# Altium PCB LED ChaserPCB.PcbDoc
Units mm, origin at the board's own origin, x right, y up, seen from the top; angles counter-clockwise.
Board outline 69.34 x 54.1 mm, 2 copper layers (Top Layer, Bottom Layer), stack 1.1 mm thick; 19 components, 17 nets, 59 pads, 15 vias.
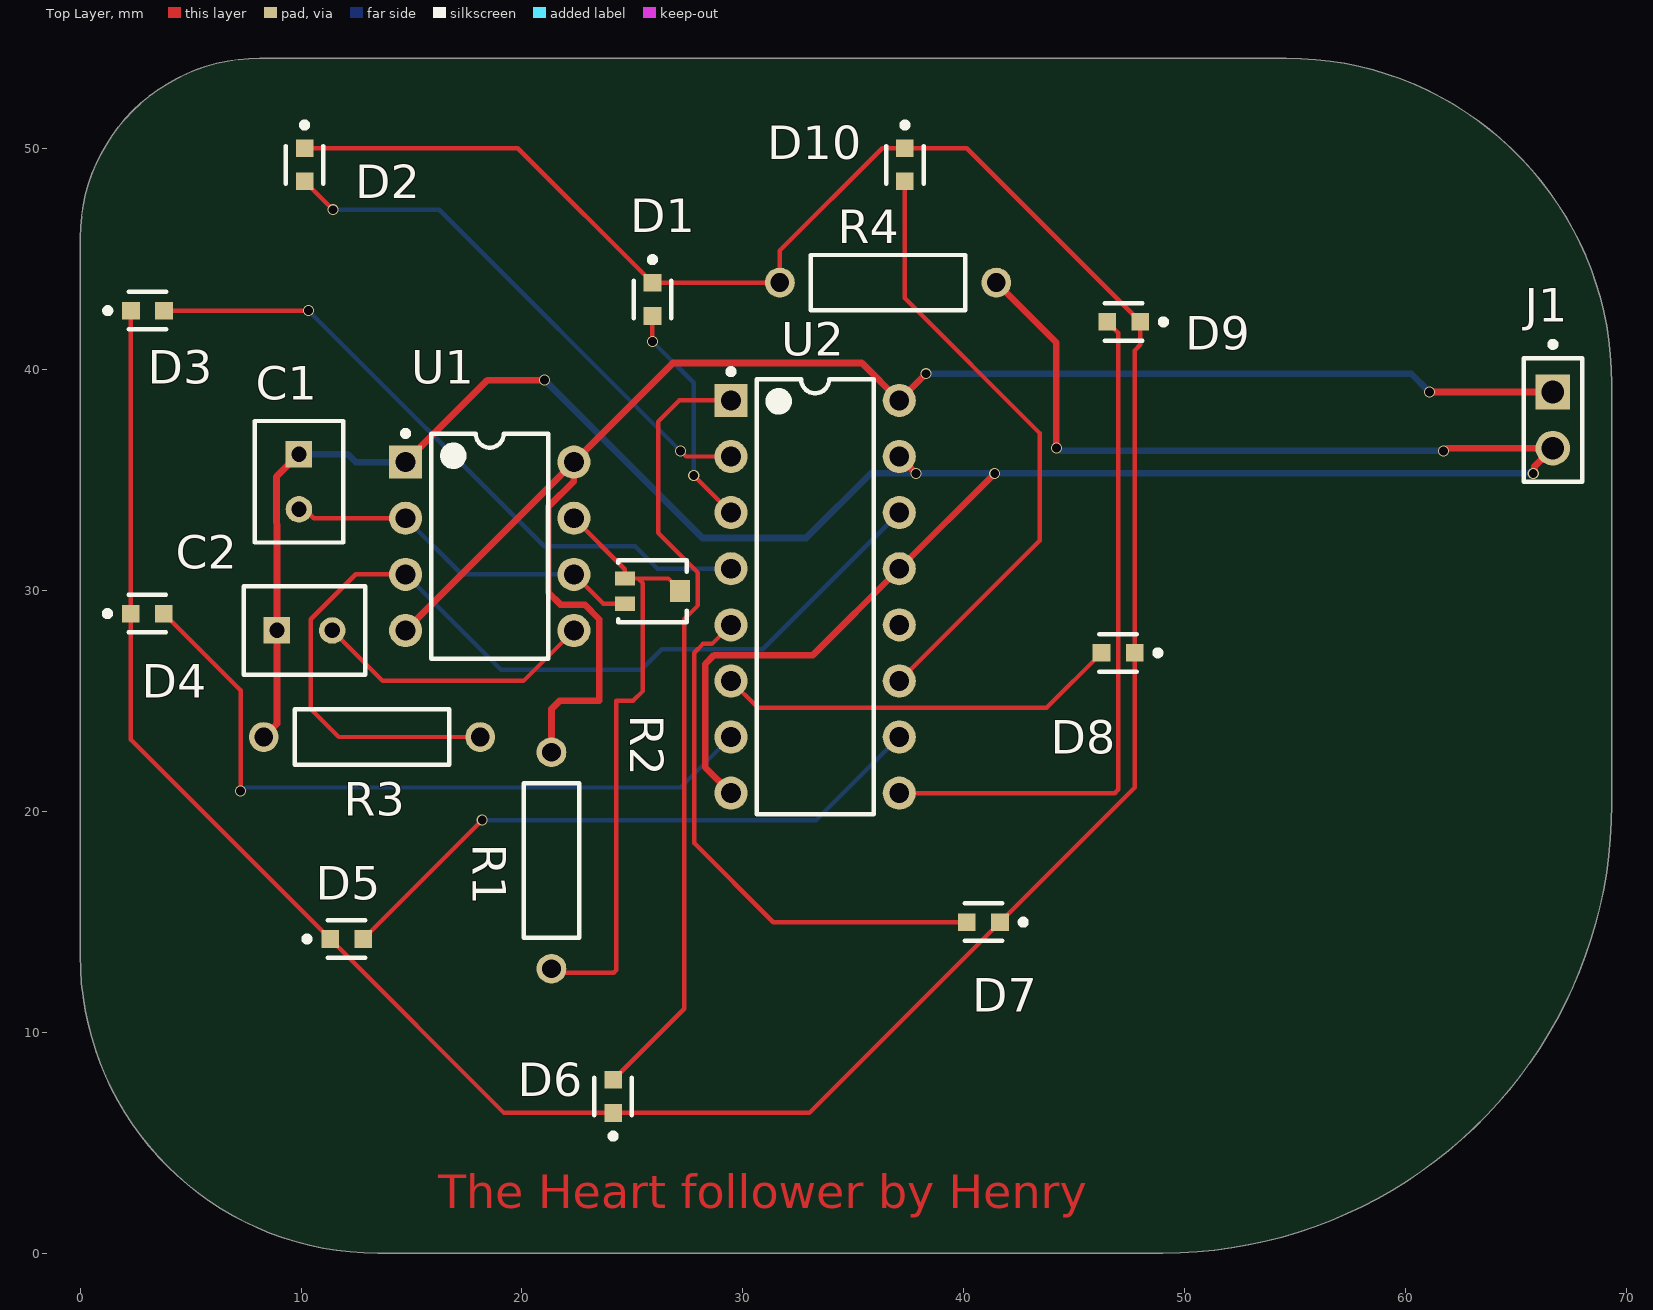
[diagram p0: Top Layer view]
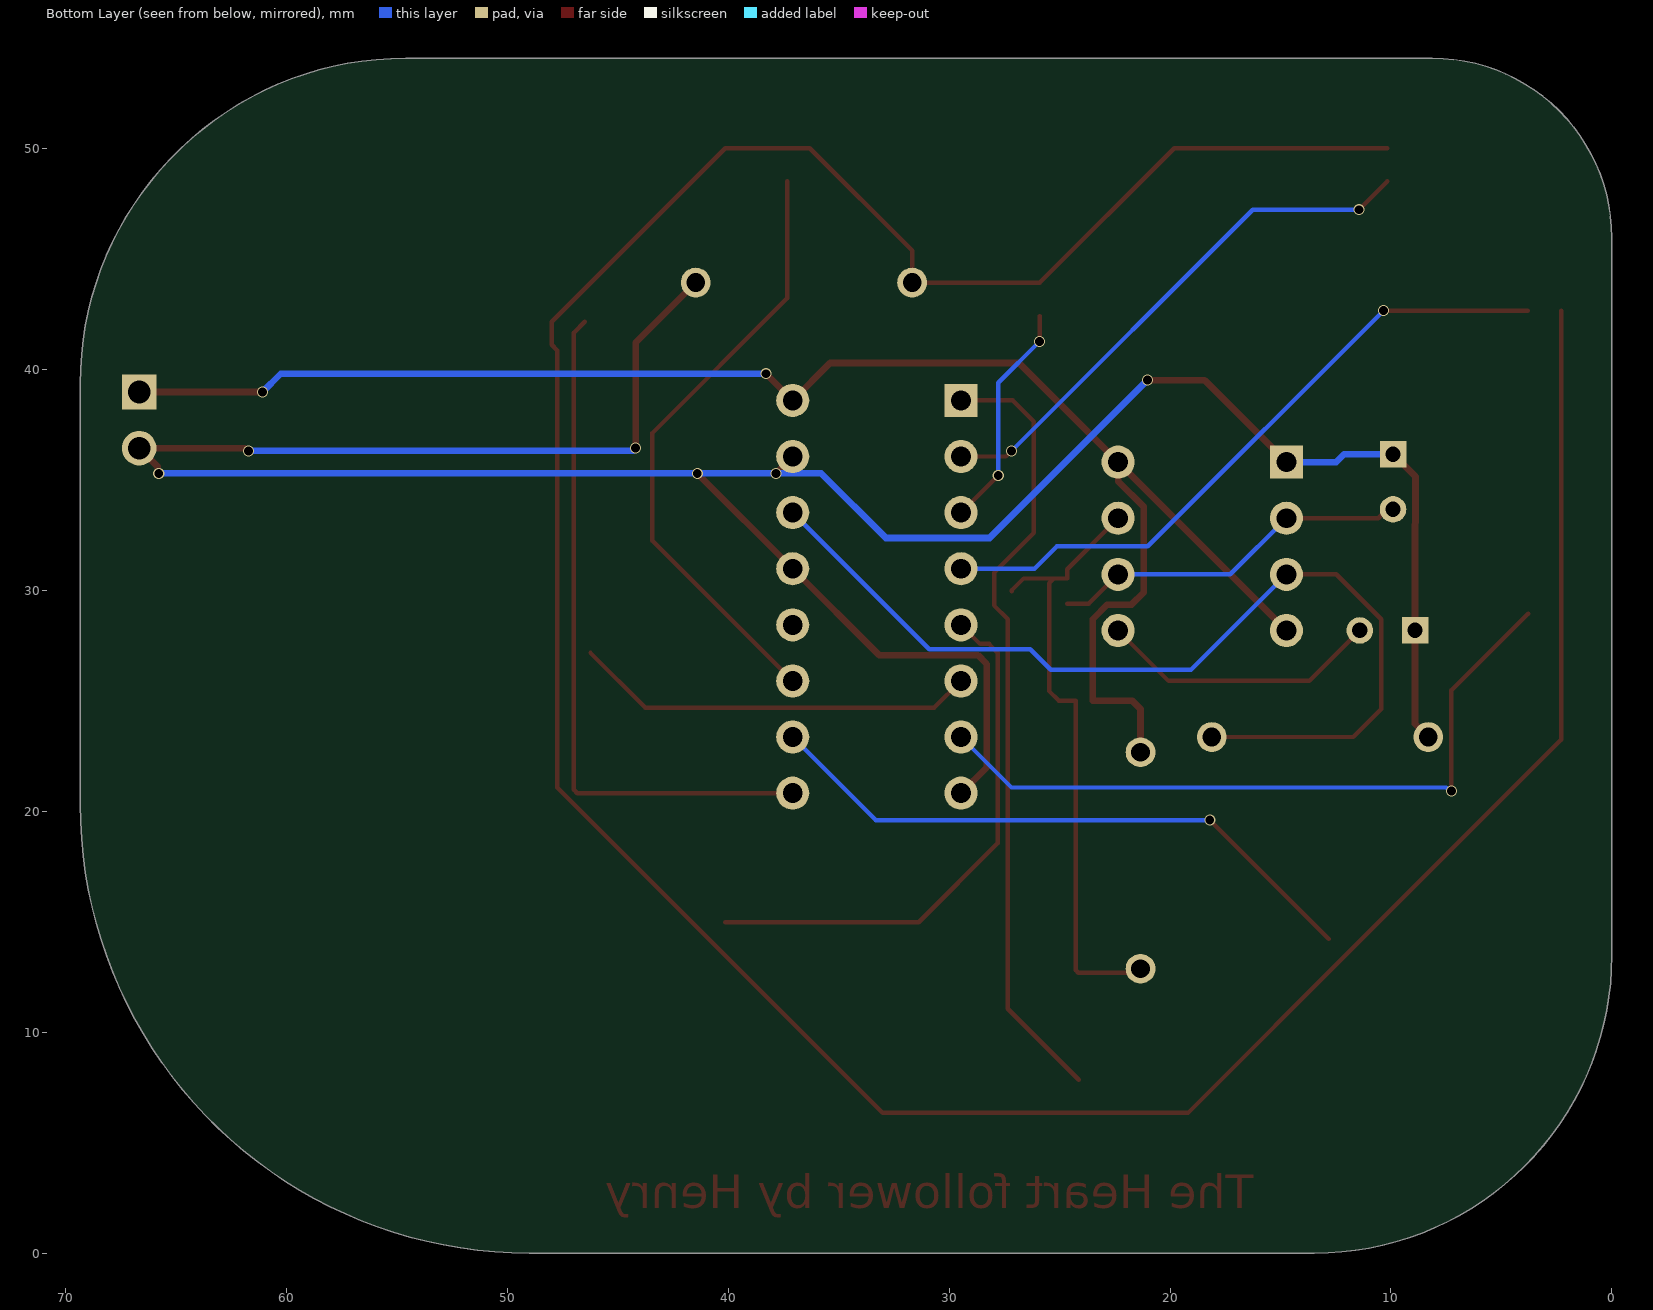
[diagram p1: Bottom Layer view, seen from below]
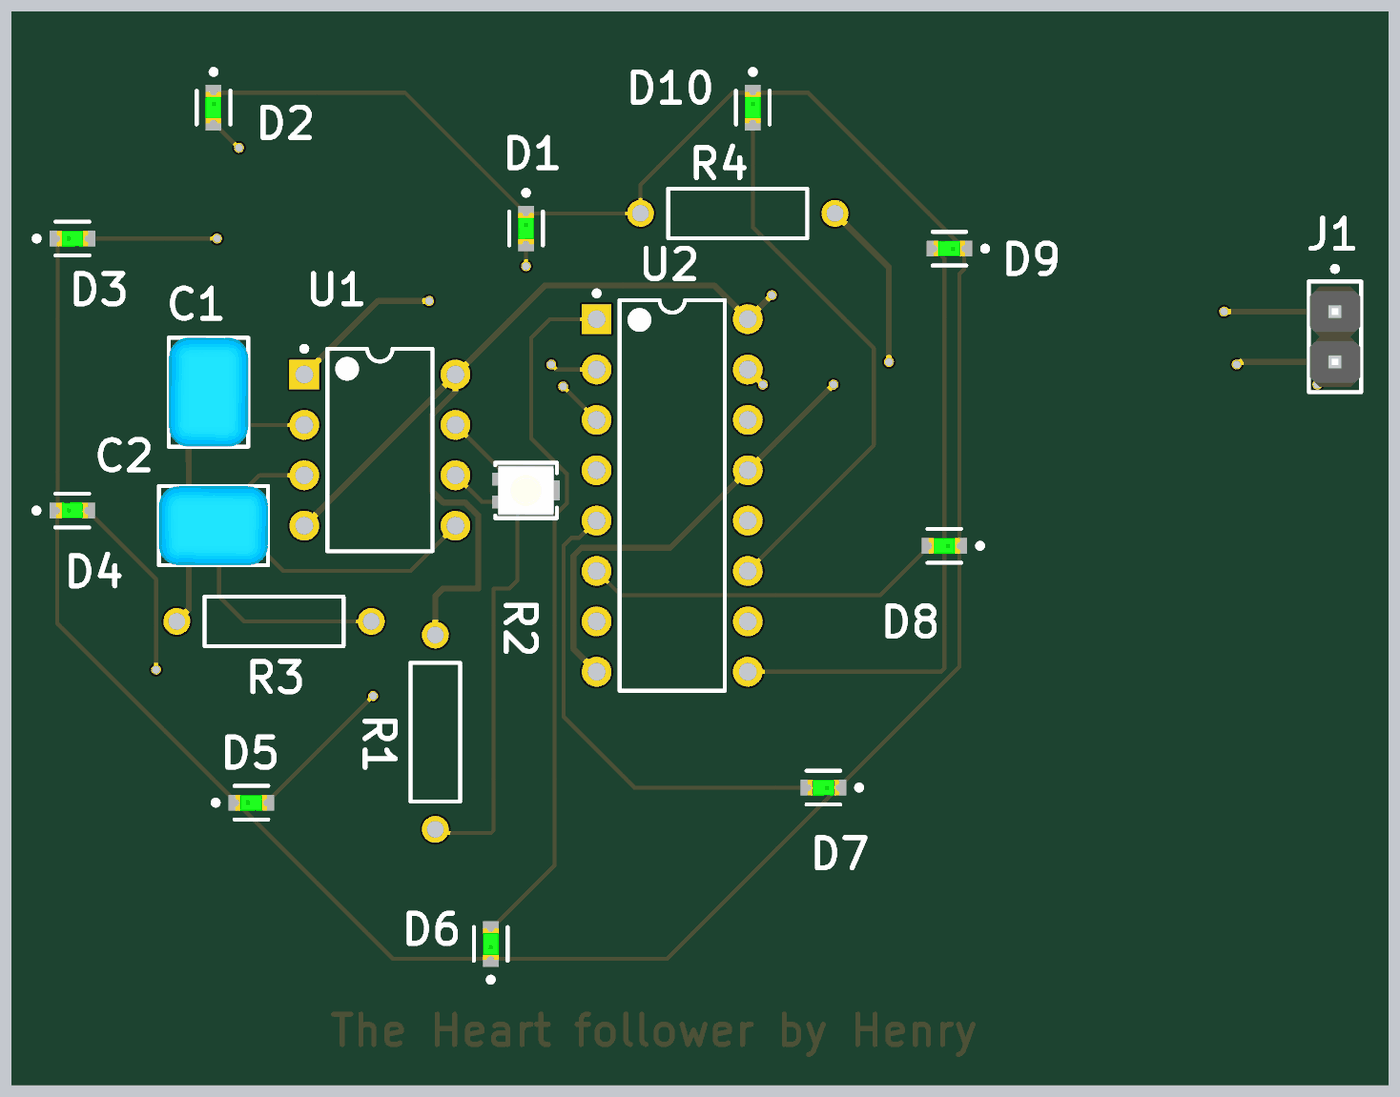
[diagram p2: 3D render of the assembled board from above, using the file's embedded part models]

## Layer stack, top to bottom
Top Solder: solder mask 0.05, Solder Resist, Dk 4
Top Layer: signal copper 0.1
Dielectric 1: dielectric 0.9, FR-4, Dk 4.8
Bottom Layer: signal copper 0.1
Bottom Solder: solder mask 0.05, Solder Resist, Dk 4

## Board outline
13.462,0 49.022,0 ccw(c49.022,20.32) 69.342,20.32 69.342,39.37 ccw(c54.61,39.37) 54.61,54.102 8.128,54.102 ccw(c8.128,45.974) 0,45.974 0,13.462 ccw(c13.462,13.462)

## Design rules (kind name [scope] priority, off if disabled: settings)
Clearance [All] p1: gap=0.25 ignorepadtopadclearanceinfootprint=FALSE
PolygonConnect [All] p1: connectstyle=Relief reliefconductorwidth=0.254 reliefentries=4 polygonreliefangle="90 Angle" airgapwidth=0.254
RoutingVias [All] p1: holewidth=0.4 width=0.5 viastyle="Through Hole" minholewidth=0.4 minwidth=0.5 maxholewidth=0.4 maxwidth=0.5
SolderMaskExpansion [All] p1: expansion=0.102 istentingtop=FALSE
Width WidthPOW [(InNet('VCC') OR InNet('GND'))] p1: maxlimit=0.3 minlimit=0.254 preferedwidth=0.3
Width [All] p2: maxlimit=0.2 minlimit=0.1 preferedwidth=0.2
30 further rules are at their usual default settings.

## Components (designator, comment, footprint, x,y, rotation, side; value= is the part's Value field where it differs from the comment)
C1 "RCER71E106K3DBH03A" FP-RCE3DB-MFG 9.906,34.925 r270 top
C2 "RCER71E106K3DBH03A" FP-RCE3DB-MFG 10.16,28.194 r0 top
D1 "LTST-C190GKT" FP-LTST-C190GKT-MFG 25.908,43.18 r270 top
D2 "LTST-C190GKT" FP-LTST-C190GKT-MFG 10.16,49.276 r270 top
D3 "LTST-C190GKT" FP-LTST-C190GKT-MFG 3.048,42.672 r0 top
D4 "LTST-C190GKT" FP-LTST-C190GKT-MFG 3.036,28.956 r0 top
D5 "LTST-C190GKT" FP-LTST-C190GKT-MFG 12.065,14.224 r0 top
D6 "LTST-C190GKT" FP-LTST-C190GKT-MFG 24.13,7.1 r90 top
D7 "LTST-C190GKT" FP-LTST-C190GKT-MFG 40.894,14.986 r180 top
D8 "LTST-C190GKT" FP-LTST-C190GKT-MFG 46.99,27.178 r180 top
D9 "LTST-C190GKT" FP-LTST-C190GKT-MFG 47.244,42.164 r180 top
D10 "LTST-C190GKT" FP-LTST-C190GKT-MFG 37.338,49.276 r270 top
J1 "M20-9990246" FP-M20-9990246-MFG 66.675,37.719 r270 top
R1 "1M" OMTE-RES7X2.5-2 21.336,17.78 r90 top
R2 "3312J-1-504E" FP-3312-MFG 25.908,29.972 r270 top
R3 "10k" OMTE-RES7X2.5-2 13.208,23.368 r0 top
R4 "120ohm" OMTE-RES7X2.5-2 36.576,43.942 r180 top
U1 "NE555P" P0008A 18.542,32.004 r0 top
U2 "CD74HC4017E" N0016A 33.274,29.718 r0 top

## Footprints (in the part's own frame and the unit in brackets; to place one, negate y for a bottom-side part, rotate by r counter-clockwise, add the part's x,y. Pads: shape width x height; smd on the part's side, far side on the other; paste and mask are expansions set on the pad)
FP-3312-MFG [mm]
  rect 0.65x0.9 smd paste+0 mask+0: 1(-0.575,-1.25) 3(0.575,-1.25)
  rect 1x0.9 smd paste+0 mask+0: 2(0,1.25)
  silkscreen extent -1.4,-1.55 1.4,1.55, body extent -1.5,-1.8 1.5,1.8, height 0.25
FP-LTST-C190GKT-MFG [mm]
  rect 0.8x0.8 smd paste+0 mask+0: 1(-0.75,0) 2(0.75,0)
  silkscreen extent -1.92,-0.85 0.85,0.85, body extent -1.25,-0.55 1.25,0.55, height 0.25
FP-M20-9990246-MFG [mm]
  rect 1.57x1.57 hole 1.02 paste-2539.97 mask+0: 1(-1.27,0)
  round 1.57 hole 1.02 paste-2539.97 mask+0: 2(1.27,0)
  silkscreen extent -3.55,-1.32 2.79,1.32, body extent -2.89,-1.42 2.89,1.42, height 0.25
FP-RCE3DB-MFG [mm]
  rect 1.2x1.2 hole 0.7 paste-2539.97 mask+0: 1(-1.25,0)
  round 1.2 hole 0.7 paste-2539.97 mask+0: 2(1.25,0)
  silkscreen extent -2.75,-2 2.75,2, body extent -2.85,-2.1 2.85,2.1, height 0.25
N0016A [mm] "DIP, 16-Leads, Body 19.7x6.6mm, Pitch 2.54mm"
  rect 1.5x1.5 hole 0.9: 1(-3.81,8.89)
  round 1.5 hole 0.9: 2(-3.81,6.35) 3(-3.81,3.81) 4(-3.81,1.27) 5(-3.81,-1.27) 6(-3.81,-3.81) 7(-3.81,-6.35) 8(-3.81,-8.89) 9(3.81,-8.89) 10(3.81,-6.35) 11(3.81,-3.81) 12(3.81,-1.27) 13(3.81,1.27) 14(3.81,3.81) 15(3.81,6.35) 16(3.81,8.89)
  silkscreen extent -3.93,-9.85 2.65,10.31, body extent -3.95,-9.85 3.95,9.85, height 5.08
OMTE-RES7X2.5-2 [mm] "Resistor, Axial; Body 7x2.5mm, Lead Dia. 0.6mm"
  round 1.35 hole 0.85: 1(-4.9,0) 2(4.9,0)
  silkscreen extent -3.5,-1.25 3.5,1.25, body extent -3.5,-1.25 3.5,1.25, height 2.5
P0008A [mm] "DIP, 8-Leads, Body 10.15x6.6mm, Pitch 2.54mm"
  rect 1.5x1.5 hole 0.9: 1(-3.81,3.81)
  round 1.5 hole 0.9: 2(-3.81,1.27) 3(-3.81,-1.27) 4(-3.81,-3.81) 5(3.81,-3.81) 6(3.81,-1.27) 7(3.81,1.27) 8(3.81,3.81)
  silkscreen extent -3.93,-5.1 2.65,5.23, body extent -3.95,-5.07 3.95,5.07, height 5.08

## Part data
C1: library part CMP-06035-005830-1, "Cap Ceramic 10uF 25V X7R ±10% Radial 2.5mm +125°C Automotive Ammo Pack", Capacitance=22uF, Case/Package=Radial, Dielectric=X7R, Max Operating Temperature=125°C, Min Operating Temperature=-55°C, Package Quantity=1500, Ratings=AEC-Q200, Resistor Type=Ceramic, Tolerance=10%, Voltage Rating=25V, Height=5mm, Height - Seated (Max)=0.197inch, Lead Diameter=0.5mm, Lead Pitch=0.098inch, Lead/Base Style=Straight, Length=0.217inch, Mount="Through Hole", Packaging="Tape and Reel", Termination=Radial, Voltage Rating (DC)=25V, Width=0.157inch
C2: library part CMP-06035-005830-1, "Cap Ceramic 10uF 25V X7R ±10% Radial 2.5mm +125°C Automotive Ammo Pack", Capacitance=10nF, Case/Package=Radial, Dielectric=X7R, Max Operating Temperature=125°C, Min Operating Temperature=-55°C, Package Quantity=1500, Ratings=AEC-Q200, Resistor Type=Ceramic, Tolerance=10%, Voltage Rating=25V, Height=5mm, Height - Seated (Max)=0.197inch, Lead Diameter=0.5mm, Lead Pitch=0.098inch, Lead/Base Style=Straight, Length=0.217inch, Mount="Through Hole", Packaging="Tape and Reel", Termination=Radial, Voltage Rating (DC)=25V, Width=0.157inch
D1 D2 D3 D4 D5 D6 D7 D8 D9 D10: library part CMP-22017-000005-2, "LED GREEN CLEAR CHIP SMD", Case Code (Imperial)=0603, Case Code (Metric)=1608, Color=Green, Forward Current=30mA, Forward Voltage=2.1V, Lens Color=Colorless, Max Operating Temperature=85°C, Min Operating Temperature=-55°C, Package Quantity=1, Power Dissipation=100mW, Reverse Voltage=5V, Test Current=10mA, Voltage=2V, Case/Package=0603, Depth=0.8mm, Dominant Wavelength=569nm, Height=0.8mm, Illumination Color=Green, Lead Free="Lead Free", Length=1.6mm, Lens Style=Clear, Lens Transparency=Clear, Luminous Intensity=6mcd, Mount="Surface Mount", Number of Elements=1, Number of LEDs=1, Number of Pins=2, Packaging="Tape and Reel", Power Rating=100mW, Radiation Hardening=No, Viewing Angle=130°, Wavelength=565nm, Width=0.8mm
J1: library part CMP-15831-000009-1, "CONN HEADER VERT 2POS 2.54MM", Current Rating=3A, Manufacturer=Harwin, Temperature="-40°C to +105°C", Temperature Range High=+105°C, Temperature Range Low=-40°C, Automotive=No, Category=Conn, ComponentLink2Description=Datasheet, ComponentLink2URL=https://cdn.harwin.com/pdfs/M20-999.pdf, Conn Gender=Male, Conn Orientation=Vertical, Contact Material=Tin,Nickel, Device Class L1=Connectors, Device Class L2="Headers and Wire Housings", Device Class L3=unset, Digikey Description="CONN HEADER VERT 2POS 2.54MM", Height=8.99mm, Lead Free=Yes, Manufacturer Part Number=M20-9990246, Mouser Description="2.54mm (0.1\") Pitch SIL Vertical PC Tail Pin Header, 6.1mm mating pin height, tin, 2 contacts", Number Of Contacts=2, Number Of Rows=1, Octopart=https://octopart.com/m20-9990246-harwin-2590635, Package=M20-9990246, Pitch=2.54mm, RoHS=TRUE
R1: library part CMP-2000-06865-1, "Little Demon(R) Carbon Composition Molded OD Series, 250 V, 10 KOhm, +/-5%, -70 to 130 degC, 2-Pin THD, RoHS, Bulk", Manufacturer=Ohmite, Operating Temperature=-, Package / Case=Axial, Package Description="2-Pin THD Resistor, Body 7 x 2.5 mm, Lead Dia. 0.6 mm", Package Reference=RES7X2.5, PartNumber=OD103JE, Power (Watts)=0.25W,1/4W, Power Rating=0.25W, Resistance (Ohms)=10M, Standard Package=100, Tolerance=±5%, Catalog Drawings=OD,OF,OASeries, Category=Resistors, Composition=CarbonComposition, Datasheet URL=http://www.ohmite.com/cat/res_od_of_oa.pdf, Datasheet Version=06/2016, EDA / CAD Models=DownloadfromAcceleratedDesigns, Family=ThroughHoleResistors, Features=PulseWithstanding, Height=-, Manufacturer URL=http://www.ohmite.com/, Mounting Technology=ThroughHole, Number of Terminations=2, Online Catalog=OD,OF,OASeries,LittleDemon®, Packaging=Bulk, RoHS Information="LittleDemon\"E\"SeriesMaterialDeclaration", Series=LittleDemon®OD, Size / Dimension="0.098\"Diax0.276\"L(2.50mmx7.00mm)", Supplier Device Package=Axial, Temperature Coefficient=-
R2: library part CMP-07234-000022-1, "TRIMMER 500K OHM 0.1W J LEAD TOP", Insulation Resistance=500MR, Max Operating Temperature=125°C, Max Power Dissipation=100mW, Min Operating Temperature=-55°C, Package Quantity=1, Resistance=50kR, Temperature Coefficient=100ppm/°C, Tolerance=20%, Voltage Rating=500V, Composition=Cermet, Depth=2.8mm, Height=0.067inch, Length=2.5mm, Mount="Surface Mount", Number of Turns=1, Packaging="Tape and Reel", Power Rating=100mW, REACH SVHC="No SVHC", Termination=J-Hook, Voltage Rating (DC)=500V, Weight=0.0321g, Width=2.5mm
R3: library part CMP-2000-06865-1, "Little Demon(R) Carbon Composition Molded OD Series, 250 V, 10 KOhm, +/-5%, -70 to 130 degC, 2-Pin THD, RoHS, Bulk", Manufacturer=Ohmite, Operating Temperature=-, Package / Case=Axial, Package Description="2-Pin THD Resistor, Body 7 x 2.5 mm, Lead Dia. 0.6 mm", Package Reference=RES7X2.5, PartNumber=OD103JE, Power (Watts)=0.25W,1/4W, Power Rating=0.25W, Standard Package=100, Tolerance=±5%, Catalog Drawings=OD,OF,OASeries, Category=Resistors, Composition=CarbonComposition, Datasheet URL=http://www.ohmite.com/cat/res_od_of_oa.pdf, Datasheet Version=06/2016, EDA / CAD Models=DownloadfromAcceleratedDesigns, Family=ThroughHoleResistors, Features=PulseWithstanding, Height=-, Manufacturer URL=http://www.ohmite.com/, Mounting Technology=ThroughHole, Number of Terminations=2, Online Catalog=OD,OF,OASeries,LittleDemon®, Packaging=Bulk, Resistance (Ohms)=10k, RoHS Information="LittleDemon\"E\"SeriesMaterialDeclaration", Series=LittleDemon®OD, Size / Dimension="0.098\"Diax0.276\"L(2.50mmx7.00mm)", Supplier Device Package=Axial, Temperature Coefficient=-
R4: library part CMP-2000-06865-1, "Little Demon(R) Carbon Composition Molded OD Series, 250 V, 10 KOhm, +/-5%, -70 to 130 degC, 2-Pin THD, RoHS, Bulk", Manufacturer=Ohmite, Operating Temperature=-, Package / Case=Axial, Package Description="2-Pin THD Resistor, Body 7 x 2.5 mm, Lead Dia. 0.6 mm", Package Reference=RES7X2.5, PartNumber=OD103JE, Power (Watts)=0.25W,1/4W, Power Rating=0.25W, Resistance (Ohms)=10k, Standard Package=100, Tolerance=±5%, Catalog Drawings=OD,OF,OASeries, Category=Resistors, Composition=CarbonComposition, Datasheet URL=http://www.ohmite.com/cat/res_od_of_oa.pdf, Datasheet Version=06/2016, EDA / CAD Models=DownloadfromAcceleratedDesigns, Family=ThroughHoleResistors, Features=PulseWithstanding, Height=-, Manufacturer URL=http://www.ohmite.com/, Mounting Technology=ThroughHole, Number of Terminations=2, Online Catalog=OD,OF,OASeries,LittleDemon®, Packaging=Bulk, RoHS Information="LittleDemon\"E\"SeriesMaterialDeclaration", Series=LittleDemon®OD, Size / Dimension="0.098\"Diax0.276\"L(2.50mmx7.00mm)", Supplier Device Package=Axial, Temperature Coefficient=-
U1: library part CMP-2000-04954-1, "Precision Timer, 4.5 to 16 V, 0 to 70 degC, 8-Pin DIP, Pb-Free, Tube", Manufacturer=TexasInstruments, Maximum High Level Output Current=-200mA, Maximum Low Level Output Current=200mA, Operating Supply Voltage=5, Package=8PDIP, Package Description="8-Pin Double In-line Package, Body 9.59 x 6.35 mm, Pitch 2.54 mm", Package Reference=P8, Category=Timer, Datasheet URL=http://www.ti.com/general/docs/lit/getliterature.tsp?genericPartNumber=NE555&fileType=pdf, Datasheet Version="Rev. I, 09/2014", Manufacturer URL=http://www.ti.com/, Number of Internal Timers=1, Package URL=http://www.ti.com/lit/ml/mpdi001b/mpdi001b.pdf, Packaging=Rail/Tube, Rad Hard=No, Type=Standard
U2: library part CMP-1623-00548-2, "High Speed CMOS Logic Decade Counter/Divider with 10 Decoded Outputs, N0016A, TUBE", F @ Nom Voltage(Max)(Mhz)=28, Generic Part Number=CD74HC4017, ICC @ Nom Voltage(Max)(mA)=0.08, Manufacturer="Texas Instruments", Operating Temperature Range(C)="-55 to 125", Rating=Catalog, tpd @ Nom Voltage(Max)(ns)=54, Voltage(Nom)(V)=3.3,5, Bits(#)=10, Code_JEDEC=MS-001, DatasheetVersion=SCHS200D, Function=Counter, Input Type=LVTTL/CMOS, Inputs=1, Output Drive (IOL/IOH)(Max)(mA)=5.2/-5.2, Output Type=CMOS, PackageReference=N0016A, Schmitt Trigger=No, Technology Family=HC, Type=Decade, VCC(Max)(V)=6, VCC(Min)(V)=2

## Via types
v1: diameter 0.5, hole 0.4, Top Layer to Bottom Layer, 15 vias

## Nets (pads, with @x,y where several pads share a name; then routed paths per layer and width w, separated by ;. In a path a pad name is that pad's centre, name@x,y a point inside that pad or via, vN(x,y) a via of type N, cw(c..) or ccw(c..) an arc to the next point about the centre after c; other vN are vias at no path point)
GND: C1.1 C2.1 J1.2 R3.1 R4.1 U1.1 U2.8 U2.13 U2.15 | length 132
  Top Layer w0.3: R3.1 8.91,23.97 C2.1 8.91,30.912 8.89,35.159 C1.1 ; U1.1 18.445,39.527 v1(21.022,39.527) ; U2.8 28.296,21.996 28.296,26.67 28.702,27.076 33.172,27.076 U2.13 v1(41.402,35.306) ; U2.15 v1(37.846,35.306) ; R4.1 44.196,41.222 v1(44.196,36.449) ; v1(61.722,36.322) 61.776,36.322 61.903,36.449 J1.2 65.824,35.598 65.824,35.344 v1(65.786,35.306)
  Bottom Layer w0.3: C1.1 12.116,36.175 12.477,35.814 U1.1 ; v1(21.022,39.527) 28.171,32.378 32.866,32.378 35.794,35.306 v1(37.846,35.306) v1(65.786,35.306) ; v1(44.196,36.449) 44.323,36.322 v1(61.722,36.322)
NetC1_2: C1.2 R2.3 U1.2 U1.6 | length 16.5
  Top Layer w0.2: C1.2 10.177,33.675 10.578,33.274 U1.2 ; U1.6 23.689,29.397 R2.3
  Bottom Layer w0.2: U1.2 17.272,30.734 U1.6
NetC2_2: C2.2 U1.5 | length 12.8
  Top Layer w0.2: C2.2 13.696,25.908 20.066,25.908 U1.5
NetD1_1: D1.1 D2.1 D3.1 D4.1 D5.1 D6.1 D7.1 D8.1 D9.1 D10.1 R4.2 | length 146.2
  Top Layer w0.2: D3.1 2.298,28.968 D4.1 2.286,23.253 D5.1 19.189,6.35 D6.1 33.008,6.35 D7.1 47.74,21.082 D8.1 47.74,40.869 47.994,41.123 D9.1 40.132,50.026 D10.1 36.31,50.026 31.676,45.392 R4.2 25.92,43.942 D1.1 19.812,50.026 D2.1
NetD1_2: D1.2 U2.3 | length 10.4
  Top Layer w0.2: v1(25.908,41.276) D1.2 ; v1(27.778,35.214) U2.3
  Bottom Layer w0.2: v1(25.908,41.276) 27.778,39.406 v1(27.778,35.214)
NetD2_2: D2.2 U2.2 | length 24.5
  Top Layer w0.2: D2.2 v1(11.442,47.244) ; v1(27.178,36.322) 27.432,36.068 U2.2
  Bottom Layer w0.2: v1(11.442,47.244) 16.256,47.244 v1(27.178,36.322)
NetD3_2: D3.2 U2.4 | length 30.5
  Top Layer w0.2: D3.2 v1(10.338,42.672)
  Bottom Layer w0.2: v1(10.338,42.672) 21.006,32.004 25.121,32.004 26.137,30.988 U2.4
NetD4_2: D4.2 U2.7 | length 32.7
  Top Layer w0.2: D4.2 7.264,25.478 v1(7.264,20.93)
  Bottom Layer w0.2: v1(7.264,20.93) 7.346,20.93 7.498,21.082 27.178,21.082 U2.7
NetD5_2: D5.2 U2.10 | length 28.1
  Top Layer w0.2: D5.2 v1(18.2,19.609)
  Bottom Layer w0.2: v1(18.2,19.609) 33.325,19.609 U2.10
NetD6_2: D6.2 U2.1 | length 35.8
  Top Layer w0.2: D6.2 27.346,11.066 27.346,28.708 27.965,29.328 27.965,30.81 26.162,32.614 26.162,37.643 27.127,38.608 U2.1
NetD7_2: D7.2 U2.5 | length 24.6
  Top Layer w0.2: U2.5 28.6,27.584 28.194,27.584 27.796,27.186 27.796,18.567 31.377,14.986 D7.2
NetD8_2: D8.2 U2.6 | length 18.3
  Top Layer w0.2: U2.6 30.683,24.689 43.751,24.689 D8.2
NetD9_2: D9.2 U2.9 | length 31.4
  Top Layer w0.2: U2.9 46.838,20.828 46.99,20.98 46.99,41.668 D9.2
NetD10_2: D10.2 U2.11 | length 27.8
  Top Layer w0.2: U2.11 43.434,32.258 43.434,37.135 37.338,43.231 D10.2
NetR1_1: R1.1 R2.1 R2.2 U1.7 | length 28.3
  Top Layer w0.2: R1.1 21.516,12.7 24.155,12.7 24.272,12.817 24.272,25.019 25.044,25.019 25.476,25.451 25.476,30.328 25.257,30.547 ; U1.7 24.658,30.968 R2.1 25.257,30.547 ; R2.2 27.158,30.022 26.633,30.547 25.257,30.547
NetR3_2: R3.2 U1.3 U2.14 | length 44.5
  Top Layer w0.2: U1.3 12.471,30.734 10.439,28.702 10.439,24.638 11.709,23.368 R3.2
  Bottom Layer w0.2: U1.3 19.05,26.416 25.4,26.416 26.332,27.348 30.904,27.348 U2.14
VCC: J1.1 R1.2 U1.4 U1.8 U2.16 | length 75.7
  Top Layer w0.3: U1.4 U1.8 ; R1.2 21.336,24.638 21.717,25.019 23.502,25.019 23.502,28.702 22.842,29.362 21.742,29.362 21.184,29.921 21.184,33.782 22.352,34.95 U1.8 ; v1(38.293,39.817) U2.16 35.39,40.302 26.84,40.302 U1.8 ; v1(61.087,38.989) J1.1
  Bottom Layer w0.3: v1(38.293,39.817) 60.259,39.817 v1(61.087,38.989)
pads on no net: U2.12

## Other copper
Top Layer:
  text "The Heart follower by Henry" at 16.216,2.032 h1.52